# EAGLE board control_board (EAGLE 9.6.2)
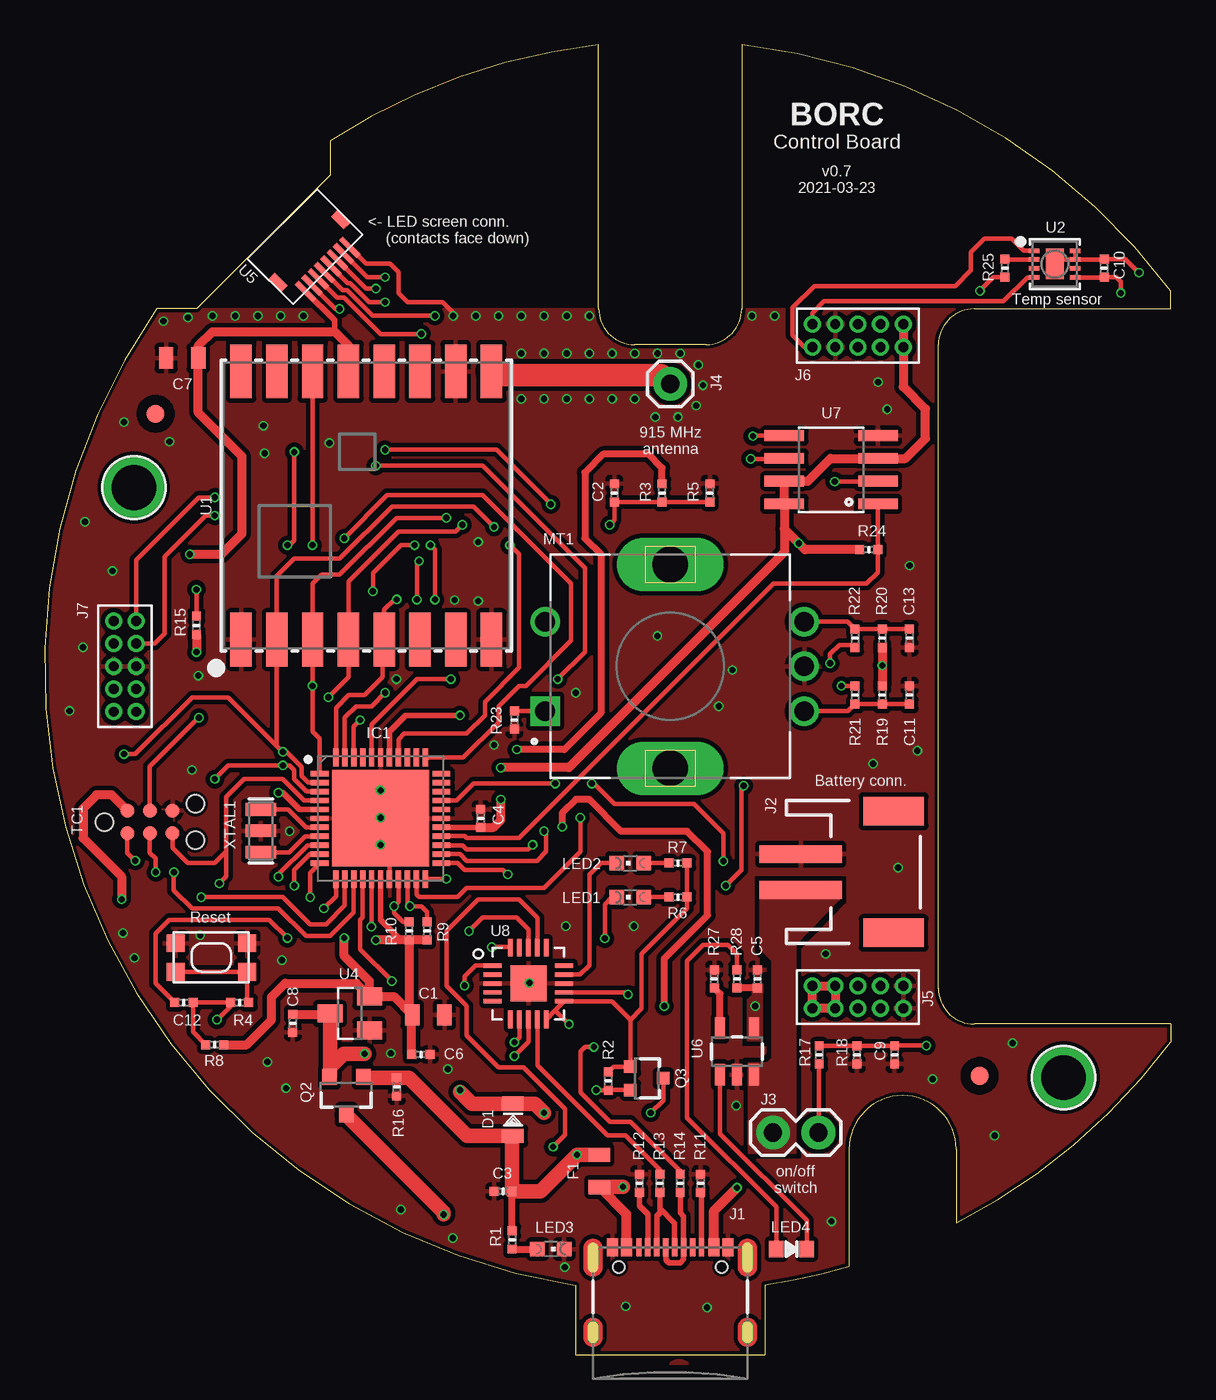
[diagram p0: board, top side]
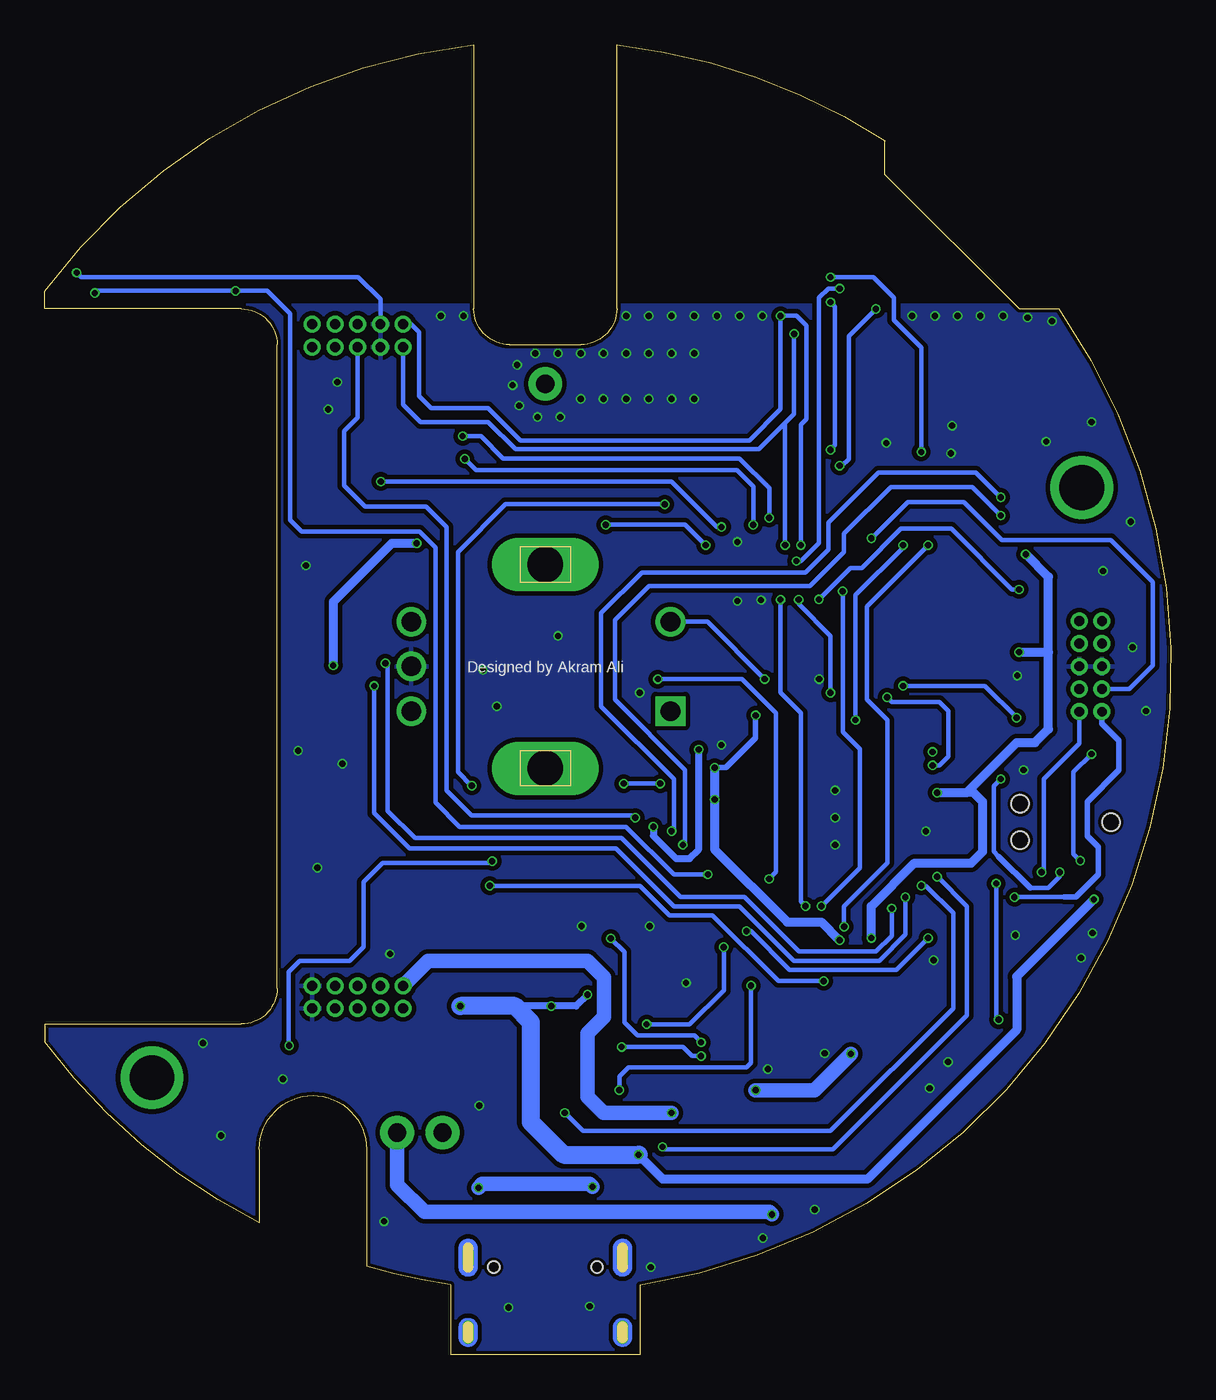
[diagram p1: board, bottom side, seen from below]

Size 62.99 x 73.27 mm. Coordinates in mm from the lower left corner, seen from the top.
Outline: 62.99,18.5 62.99,17.5 arc-26 50.99,7.37 50.99,11.5 arc180 44.99,11.5 44.99,4.96 arc-8 40.29,3.9 40.29,0 29.69,0 29.69,3.9 arc-116 6.26,58.5 8.49,58.5 15.99,66 15.99,67.89 arc-26 30.99,73.27 30.99,58.5 arc90 32.99,56.5 36.99,56.5 arc90 38.99,58.5 38.99,73.27 arc-47 62.99,59.5 62.99,58.5 51.99,58.5 arc90 49.99,56.5 49.99,20.5 arc90 51.99,18.5 62.99,18.5
Copper layers (1*16): Top 0.035559375mm / dielectric 1.6mm / Bottom 0.035559375mm
Design rules "jlcpcb2layer *": minimum track width 5mil, minimum drill 12mil, track to track 5mil, track to pad 5mil, pad to pad 5mil, via to via 5mil, smd to smd 5mil, copper to edge 8mil, drill to drill 6mil, minimum pad ring 5mil, minimum via ring 3mil, stop-mask expansion 2.5mil, vias tented up to drill 14mil, thermal gap 10mil
Net classes: 1 power: width 0.381 mm, clearance 0.254 mm

## Footprints (pad centres in the part's own frame; a part is rotated, then mirrored left to right if it is on the bottom)
0805 = smd 0.8 x 1.2: 1 -0.9,0; 2 0.9,0
MICROBUILDER__0402MP = smd 0.5 x 0.5: 1 -0.508,0; 2 0.508,0
QFN50P700X700X100-45N = smd 1 x 0.3: 1 -3.4,2.5; 2 -3.4,2; 3 -3.4,1.5; 4 -3.4,1; 5 -3.4,0.5; 6 -3.4,0; 7 -3.4,-0.5; 8 -3.4,-1; 9 -3.4,-1.5; 10 -3.4,-2; 11 -3.4,-2.5; 23 3.4,-2.5; 24 3.4,-2; 25 3.4,-1.5; 26 3.4,-1; 27 3.4,-0.5; 28 3.4,0; 29 3.4,0.5; 30 3.4,1; 31 3.4,1.5; 32 3.4,2; 33 3.4,2.5 | smd 0.3 x 1: 12 -2.5,-3.4; 13 -2,-3.4; 14 -1.5,-3.4; 15 -1,-3.4; 16 -0.5,-3.4; 17 0,-3.4; 18 0.5,-3.4; 19 1,-3.4; 20 1.5,-3.4; 21 2,-3.4; 22 2.5,-3.4; 34 2.5,3.4; 35 2,3.4; 36 1.5,3.4; 37 1,3.4; 38 0.5,3.4; 39 0,3.4; 40 -0.5,3.4; 41 -1,3.4; 42 -1.5,3.4; 43 -2,3.4; 44 -2.5,3.4 | smd 5.4 x 5.4: 45 0,0
USB-C-16P-2LAYER-PADS = smd 0.3 x 1: A5 -1.25,-0.34; A6 -0.25,-0.34; A7 0.25,-0.34; A8 1.25,-0.34; B5 1.75,-0.34; B6 0.75,-0.34; B7 -0.75,-0.34; B8 -1.75,-0.34 | smd 0.6 x 1: GND -3.225,-0.34; GND2 3.225,-0.34; VBUS1 -2.45,-0.34; VBUS2 2.45,-0.34 | drill 0.4 pad 0.6 long: SHLD1 -4.318,-0.915; SHLD2 4.318,-0.915; SHLD3 -4.318,-5.095; SHLD4 4.318,-5.095 | hole 0.65: -2.89,-1.445; 2.89,-1.445
JST-2-SMD = smd 1 x 4.6: 1 -1,-3.7; 2 1,-3.7 | smd 1.6 x 3.4: NC1 -3.4,1.5; NC2 3.4,1.5
1X02 = drill 1.016 pad 1.88: 1 0,0; 2 2.54,0
1X01 = drill 1.016 pad 1.88: 1 0,0
HEADER_1.27MM_2X5 = drill 0.55 pad 0.95: 1 0.865,0.865; 2 2.135,0.865; 3 0.865,2.135; 4 2.135,2.135; 5 0.865,3.405; 6 2.135,3.405; 7 0.865,4.675; 8 2.135,4.675; 9 0.865,5.945; 10 2.135,5.945
CHIPLED_0603 = smd 0.8 x 0.8: A 0,-0.75; C 0,0.75
0603-LED = smd 0.8 x 0.9: MINUS -0.85,0; PLUS 0.85,0
XDCR_PEC11R-4215F-S0024 = drill 1.1 square: 1 -2.5,7 | drill 1.1: 2 2.5,7; A -2.5,-7.5; B 2.5,-7.5; COM 0,-7.5 | drill 2 long: S1 -5.7,0; S2 5.7,0
SOT23-3 = smd 0.8 x 0.9: 1 -0.95,-1; 2 0.95,-1; 3 0,1.1
SOT323 = smd 0.7 x 0.7: 1 -0.65,-0.925; 2 0.65,-0.925; 3 0,0.925
KMR2 = smd 1 x 1: 1 2,0.8; 2 2,-0.8; 3 -2,0.8; 4 -2,-0.8
TC2030-IDC-NL = smd 0.787 x 0.787: 1 -1.27,-0.635; 2 -1.27,0.635; 3 0,-0.635; 4 0,0.635; 5 1.27,-0.635; 6 1.27,0.635 | hole 0.991: -2.54,0; 2.54,1.016; 2.54,-1.016
RFM69HCW-XXXS2 = smd 3 x 1.2: 1 -7.5,7; 2 -7.5,5; 3 -7.5,3; 4 -7.5,1; 5 -7.5,-1; 6 -7.5,-3; 7 -7.5,-5; 8 -7.5,-7; 9 7.5,-7; 10 7.5,-5; 11 7.5,-3; 12 7.5,-1; 13 7.5,1; 14 7.5,3; 15 7.5,5; 16 7.5,7
SHT3X = smd 0.6 x 0.25: 1 -1.15,0.75; 2 -1.15,0.25; 3 -1.15,-0.25; 4 -1.15,-0.75; 5 1.15,-0.75; 6 1.15,-0.25; 7 1.15,0.25; 8 1.15,0.75 | smd 1 x 1.7: THERMAL 0,0
SOT23 = smd 1 x 1.4: 1 -0.95,-1.1; 2 0.95,-1.1; 3 0,1.1
59453-081110EDHLF = smd 0.3 x 1.4: P$1 1,3.6; P$2 1.5,3.6; P$3 2,3.6; P$4 2.5,3.6; P$5 3,3.6; P$6 3.5,3.6; P$7 4,3.6; P$8 4.5,3.6 | smd 0.52 x 1: P$9 0.26,2.15; P$10 5.24,2.15
SOT23-5 = smd 0.55 x 1.2: 1 -0.95,-1.3; 2 0,-1.3; 3 0.95,-1.3; 4 0.95,1.3; 5 -0.95,1.3
SO08 = smd 0.61 x 2.21: 1_CS -1.905,-2.616; 2_SO -0.635,-2.616; 3_WP 0.635,-2.616; 4_GND 1.905,-2.616; 5_SI 1.905,2.616; 6_SCK 0.635,2.616; 7_HOLD -0.635,2.616; 8_VCC -1.905,2.616
FTDI_FT231XQ-R_PACKAGE = smd 0.25 x 1: 3V3OUT 0.968,-2.032; CBUS2 -0.532,-2.032; CBUS3 0.968,1.968; CTS# -1.032,-2.032; DTR# -0.032,1.968; RTS# -0.532,1.968; TXD 0.468,1.968; USBDM 0.468,-2.032; USBDP -0.032,-2.032; VCCIO -1.032,1.968 | smd 1 x 0.25: CBUS0 1.968,0.968; CBUS1 1.968,0.468; DCD# -2.032,-1.032; DSR# -2.032,-0.532; GND_PIN3 -2.032,-0.032; GND_PIN13 1.968,-0.032; RESET# 1.968,-1.032; RI# -2.032,0.468; RXD -2.032,0.968; VCC 1.968,-0.532 | smd 2 x 2: GND_PIN21 -0.032,-0.032
MOUNTINGHOLE_2.5_PLATED = drill 2.5 pad 3.2: P$1 0,0
FIDUCIAL_1MM = smd 1 x 1: 1 0,0
RESONATOR-SMD = smd 0.7 x 1.7: 1 -1.2,0; 2 0,0; 3 1.2,0

## Placement (x,y rotation side)
C1  0.33µF  [0805]  21.45,19.01 0 top
C2  0.1uF  [MICROBUILDER__0402MP]  31.86,48.2 90 top
C3  0.1uF  [MICROBUILDER__0402MP]  25.64,9.14 180 top
C4  0.1uF  [MICROBUILDER__0402MP]  24.39,30 90 top
C5  10uF  [MICROBUILDER__0402MP]  39.86,21.03 270 top
C6  0.1uF  [MICROBUILDER__0402MP]  21.04,16.79 0 top
C7  0.33µF  [0805]  7.69,55.75 0 top
C8  1uF  [MICROBUILDER__0402MP]  13.87,18.54 270 top
C9  0.1uF  [MICROBUILDER__0402MP]  47.54,16.77 270 top
C10  0.1uF  [MICROBUILDER__0402MP]  59.25,60.77 90 top
C11  0.1uF  [MICROBUILDER__0402MP]  48.37,36.9 270 top
C12  0.1uF  [MICROBUILDER__0402MP]  7.79,19.7 0 top
C13  0.1uF  [MICROBUILDER__0402MP]  48.37,40.08 90 top
D1  [0805]  26.19,13.15 90 top
F1  6V 0.5A  [0805]  31.02,10.29 90 top
IC1  ATMEGA1284P-MU  [QFN50P700X700X100-45N]  18.79,30 0 top
J1  USB Female Type C Connector  [USB-C-16P-2LAYER-PADS]  34.99,6.35 0 top
J2  [JST-2-SMD]  45.99,27 270 top
J3  [1X02]  43.27,12.43 180 top
J4  [1X01]  34.99,54.3 0 top
J5  20021311-00010T4LF  [HEADER_1.27MM_2X5]  48.89,18.5 90 top
J6  20021311-00010T4LF  [HEADER_1.27MM_2X5]  48.89,55.5 90 top
J7  20021311-00010T4LF  [HEADER_1.27MM_2X5]  2.99,35.1 0 top
LED1  [CHIPLED_0603]  32.75,25.6 90 top
LED2  [CHIPLED_0603]  32.75,27.5 90 top
LED3  PWR  [CHIPLED_0603]  28.31,5.91 270 top
LED4  LED0603  [0603-LED]  41.77,5.91 180 top
MT1  PEC11R-4215F-S0024  [XDCR_PEC11R-4215F-S0024]  34.99,38.5 90 top
Q2  BSS84-7-F  [SOT23-3]  16.87,14.54 180 top
Q3  BSS138PW,115  [SOT323]  33.68,15.46 270 top
R1  1K  [MICROBUILDER__0402MP]  26.15,6.42 270 top
R2  10K  [MICROBUILDER__0402MP]  31.52,15.31 270 top
R3  10M  [MICROBUILDER__0402MP]  34.53,48.2 90 top
R4  100  [MICROBUILDER__0402MP]  10.9,19.7 0 top
R5  10M  [MICROBUILDER__0402MP]  37.2,48.2 90 top
R6  330  [MICROBUILDER__0402MP]  35.42,25.6 180 top
R7  330  [MICROBUILDER__0402MP]  35.42,27.5 180 top
R8  10K  [MICROBUILDER__0402MP]  9.51,17.34 180 top
R9  4.7K  [MICROBUILDER__0402MP]  21.39,23.7 270 top
R10  4.7K  [MICROBUILDER__0402MP]  20.39,23.7 270 top
R11  5.1K  [MICROBUILDER__0402MP]  36.69,9.6 90 top
R12  5.1K  [MICROBUILDER__0402MP]  33.26,9.6 90 top
R13  27  [MICROBUILDER__0402MP]  34.4,9.6 270 top
R14  27  [MICROBUILDER__0402MP]  35.55,9.6 270 top
R15  10K  [MICROBUILDER__0402MP]  8.49,40.8 90 top
R16  10K  [MICROBUILDER__0402MP]  19.69,14.98 90 top
R17  10M  [MICROBUILDER__0402MP]  43.32,16.77 270 top
R18  10M  [MICROBUILDER__0402MP]  45.43,16.77 270 top
R19  10K  [MICROBUILDER__0402MP]  46.85,36.9 270 top
R20  10K  [MICROBUILDER__0402MP]  46.85,40.08 90 top
R21  10K  [MICROBUILDER__0402MP]  45.32,36.9 90 top
R22  10K  [MICROBUILDER__0402MP]  45.32,40.08 270 top
R23  10K  [MICROBUILDER__0402MP]  26.27,35.5 270 top
R24  10K  [MICROBUILDER__0402MP]  46.09,45.03 0 top
R25  10K  [MICROBUILDER__0402MP]  53.71,60.78 90 top
R27  2K  [MICROBUILDER__0402MP]  37.45,21.03 90 top
R28  1K  [MICROBUILDER__0402MP]  38.72,21.03 270 top
SW1  SPST_TACT-KMR2  [KMR2]  9.32,22.22 180 top
TC1  TC2030-IDC-NL  [TC2030-IDC-NL]  5.89,29.8 0 top
U1  915MHz  [RFM69HCW-XXXS2]  17.99,47.5 90 top
U2  [SHT3X]  56.49,61 0 top
U4  MCP1703CB  [SOT23]  17.06,19.08 90 top
U5  59453-081110EDHLF  [59453-081110EDHLF]  15.23,65.2 225 top
U6  MCP73831  [SOT23-5]  38.72,16.96 0 top
U7  AT25F512BJEDEC_3.9MM  [SO08]  43.99,49.5 90 top
U8  FT231XQ-R  [FTDI_FT231XQ-R_PACKAGE]  27.09,20.8 0 top
U$2  MOUNTINGHOLE2.5  [MOUNTINGHOLE_2.5_PLATED]  56.99,15.5 0 top
U$3  MOUNTINGHOLE2.5  [MOUNTINGHOLE_2.5_PLATED]  4.99,48.5 0 top
U$8  FIDUCIAL  [FIDUCIAL_1MM]  52.29,15.6 0 top
U$9  FIDUCIAL  [FIDUCIAL_1MM]  6.2,52.63 0 top
XTAL1  16 MHz  [RESONATOR-SMD]  12.09,29.3 90 top

## Library data of the parts
C1 C7 = SparkFun-Capacitors; PROD_ID: CAP-08469
C2-C6 C8-C13 = Adafruit Feather 32u4 Bluefruit LE; MPN: GRM155R71C104KA88J
D1 = SCHOTTKY_0805
F1 = SparkFun-Fuses; MPN: MF-PSML110-2; PROD_ID: RES-13945
IC1 = ATMEGA1284P-MU; AVAILABILITY: Warning; DESCRIPTION: AVR AVR® ATmega Microcontroller IC 8-Bit 20MHz 128KB (64K x 16) FLASH 44-VQFN (7x7); MF: Microchip; MP: ATMEGA1284P-MU; PACKAGE: VQFN-44 Microchip; PRICE: None; PURCHASE-URL: https://pricing.snapeda.com/search/part/ATMEGA1284P-MU/?ref=eda
J1 = SparkFun-Connectors; PROD_ID: CONN-14122
J2 = SparkFun-Connectors; PROD_ID: CONN-11443; SF_ID: PRT-08612
J3 J4 = SparkFun-Connectors
J5-J7 = Amphenol
LED1-LED3 SW1 U$8 U$9 = adafruit
LED4 U7 = LowPowerLab
MT1 = PEC11R-4215F-S0024; AVAILABILITY: Warning; DESCRIPTION: Rotary Encoder Mechanical 24 Quadrature (Incremental) Vertical; MF: Bourns; MP: PEC11R-4215F-S0024; PACKAGE: None; PRICE: None; PURCHASE-URL: https://pricing.snapeda.com/search/part/PEC11R-4215F-S0024/?ref=eda
Q2 Q3 = MOSFETs
R1 R2 R4 R6-R16 R19-R25 R27 R28 = Adafruit Feather 32u4 Bluefruit LE; MPN: RC0402FR-7W10KL
R3 R5 R17 R18 = Adafruit Feather 32u4 Bluefruit LE; MPN: RC0402JR-0710KL
TC1 = TagConnect
U1 = SparkFun-RF; PROD_ID: IC-11997
U2 = SHT31
U4 = linear
U5 = 59453-081110EDHLF
U6 XTAL1 = SparkFun
U8 = ftdi_ft231xq-r
U$2 U$3 = ADS1x15

## Nets
A: C11.2 MT1.A R19.2 R21.1
ANT: J4.1 U1.9
B: C13.2 MT1.B R20.2 R22.1
BLUE: IC1.16 U5.P$2
CHANNEL_A: IC1.11 R21.2
CHANNEL_B: IC1.12 R22.2
CS: IC1.26 R24.2 U7.1_CS
CURRENT_SENSE_POWER: IC1.24 J7.10
D2: IC1.42 U1.14
DRIVER_POWER: IC1.21 J6.5
DTR: C12.1 U8.DTR#
FTDI_3.3V: Q3.1 R2.1 R6.1 R7.1 U8.3V3OUT U8.RESET# U8.VCCIO
GND [power]: C1.2 C2.2 C3.2 C4.2 C5.1 C6.2 C7.1 C8.2 C9.2 C10.2 C11.1 C13.1 IC1.6 IC1.18 IC1.28 IC1.39 IC1.45 J1.GND J1.GND2 J2.1 J5.1 J5.2 J6.7 J6.8 J7.5 J7.6 LED3.C MT1.COM R5.2 R11.2 R12.2 R16.1 R18.2 R23.2 R27.2 SW1.2 SW1.4 TC1.6 U1.1 U1.8 U1.10 U2.7 U2.8 U2.THERMAL U4.1 U5.P$1 U6.2 U7.4_GND U8.GND_PIN3 U8.GND_PIN13 U8.GND_PIN21 XTAL1.2
GREEN: IC1.43 U5.P$3
IN1: IC1.13 J7.1
IN2: IC1.14 J7.2
KNOB: IC1.40 MT1.2
MISO: IC1.2 TC1.1 U1.2 U7.2_SO
MOSI: IC1.1 TC1.4 U1.3 U7.5_SI
MOTOR_CONTROL: IC1.25 J7.8
N$1: IC1.8 XTAL1.1
N$2: LED3.A R1.2
N$3: IC1.7 XTAL1.3
N$4: J1.B5 R11.1
N$5: J1.A5 R12.1
N$6: J1.A6 J1.B6 R14.2
N$7: J1.A7 J1.B7 R13.2
N$8: R14.1 U8.USBDP
N$9: R13.1 U8.USBDM
N$10: F1.1 J1.VBUS1 J1.VBUS2
N$11: MT1.1 R23.1
N$12: R4.2 SW1.1 SW1.3
N$13: LED1.C U8.CBUS2
N$14: Q3.2 R2.2 U8.RXD
N$15: LED1.A R6.2
N$16: LED4.PLUS R28.1
N$17: LED2.A R7.2
N$18: LED2.C U8.CBUS1
N$19: LED4.MINUS U6.1
N$20: R25.2 U2.2
PROG1: R27.1 U6.5
RED: IC1.15 U5.P$4
RESET: C12.2 IC1.4 R4.1 R8.2 TC1.5
RX: IC1.9 U8.TXD
SCK: IC1.3 TC1.3 U1.4 U7.6_SCK
SCL: IC1.19 J6.10 R10.1 U2.4 U5.P$5
SDA: IC1.20 J6.9 R9.1 U2.1 U5.P$6
SDB: IC1.22 U5.P$7
SS: IC1.44 R15.2 U1.5
TEMP: IC1.34 J7.3
TEMP_SENSOR_POWER: C10.1 IC1.23 R25.1 U2.5
TX: IC1.10 Q3.3
VBAT: J3.1 Q2.3 R17.2
VBAT_CHG: J2.2 J3.2 U6.3
VBAT_SENSE: C9.1 IC1.30 R17.1 R18.1
VBUS [power]: C3.1 C5.2 D1.1 F1.2 Q2.1 R1.1 R3.2 R16.2 R28.2 TC1.2 U6.4 U8.VCC
VBUS_SENSE: C2.1 IC1.37 R3.1 R5.1
VCC: C1.1 C4.1 C6.1 C7.2 IC1.5 IC1.17 IC1.27 IC1.38 J6.1 J6.2 R8.1 R9.2 R10.2 R15.1 R19.1 R20.1 R24.1 U1.13 U4.2 U5.P$8 U7.3_WP U7.7_HOLD U7.8_VCC
VIN [power]: C8.1 D1.2 J5.7 J5.8 J5.9 J5.10 Q2.2 U4.3

## Tracks (layer width: path | path; a pad name or v marks a point on that pad's centre or on a via)
A
  Top 0.254: C11.2 R19.2 R21.1 44.93,36 MT1.A
ANT
  Top 1.27: J4.1 34.96,54.3 34.46,54.8 25.19,54.8 U1.9
B
  Top 0.254: C13.2 R20.2 R22.1 44.91,41 MT1.B
BLUE  (via drill 0.35)
  Top 0.254: v13.57,45.28 13.7,45.28 13.96,45.54 v13.96,50.49 | U5.P$2 18.04,60.27 v19.04,60.27 | IC1.16 v18.29,23.96 v18.27,23.95
  Bottom 0.254: v13.57,45.28 17,41.85 17,36.65 15.86,35.5 15.86,27.5 18.27,25.09 v18.27,23.95 | v19.04,60.27 16.62,60.27 15.48,59.13 15.48,57.86 13.96,56.33 v13.96,50.49
CHANNEL_A  (via drill 0.35)
  Top 0.254: IC1.11 14.84,26.96 v14.84,25.6 | R21.2 v44.56,37.41
  Bottom 0.254: v14.84,25.6 14.84,23.5 16.3,22.04 21.07,22.04 24.12,25.09 27.8,25.09 31.03,28.32 42.58,28.32 44.56,30.3 v44.56,37.41
CHANNEL_B  (via drill 0.35)
  Top 0.254: IC1.12 16.29,25.64 v15.61,24.96 | R22.2 45.2,39.7 44.44,39.7 43.93,39.19 v43.93,38.68
  Bottom 0.254: v15.61,24.96 15.61,23.44 16.5,22.55 20.81,22.55 23.86,25.6 27.42,25.6 30.72,28.9 42.28,28.9 43.8,30.42 43.8,38.55 v43.93,38.68
CS
  Top 0.254: IC1.26 22.21,29.03 23.48,29.03 23.61,28.9 26.53,28.9 40.75,43.12 45.96,43.12 46.59,43.76 R24.2 46.59,47.19 46.6,47.2 U7.1_CS
CURRENT_SENSE_POWER  (via drill 0.35)
  Top 0.254: IC1.24 23.23,28.01 23.61,27.63 27.54,27.63 28.05,28.14 28.05,29.15 v27.93,29.28 | J7.10 5.12,44.45 8.62,47.95 v9.51,47.95
  Bottom 0.254: v9.51,47.95 10.91,49.35 16.37,49.35 19.16,46.55 19.16,45.03 20.43,43.76 29.58,43.76 31.86,41.47 31.86,36.27 27.8,32.2 27.8,29.41 v27.93,29.28
D2  (via drill 0.35)
  Top 0.254: IC1.42 17.29,35.15 v17.64,35.5 | v14.97,45.28 14.97,54.99 U1.14
  Bottom 0.254: v14.97,45.28 14.97,45.16 17.64,42.49 v17.64,35.5
DRIVER_POWER  (via drill 0.35)
  Top 0.254: IC1.21 20.79,25.75 20.94,25.6 23.1,25.6 23.61,26.11 27.93,26.11 29.96,28.14 v29.96,30.04
  Bottom 0.254: J6.5 45.48,52.43 46.24,51.67 46.24,48.61 45.07,47.44 41.64,47.44 40.5,46.3 40.5,31.57 39.1,30.17 30.08,30.17 v29.96,30.04
DTR  (via drill 0.35)
  Top 0.254: U8.DTR# 27.05,23.8 26.4,24.45 24.5,24.45 v23.73,23.69 | v13.57,23.31 12.56,24.33 6.97,24.33 6.21,23.57 6.21,20.77 C12.1
  Bottom 0.254: v23.73,23.69 23.48,23.69 21.32,21.53 15.35,21.53 v13.57,23.31
FTDI_3.3V  (via drill 0.35)
  Top 0.254: 28.55,19.26 U8.RESET# 31.72,19.77 32.75,18.74 | 28.55,19.26 U8.3V3OUT | U8.VCCIO 26.05,22.8 v25,22.8 | v29.32,18.49 28.55,19.26 | R2.1 31.81,16.11 Q3.1 32.75,18.74 | R7.1 R6.1 35.93,24.96 33.39,22.42 33.39,19.37 32.75,18.74
  Bottom 0.254: v25,22.8 25,20.39 26.91,18.49 v29.32,18.49
GND  (via drill 0.35)
  Top 0.254: C10.2 60.44,61.28 v61.2,60.52 | U2.7 U2.8 | U5.P$1 17.98,61.03 19.33,61.03 19.8,60.56 19.8,59.38 20.31,58.87 22.25,58.87 22.85,58.28 v22.85,58.11 | U2.7 56.74,61.25 U2.THERMAL | IC1.18 19.29,28.02 v18.78,28.52 | U2.7 59.22,61.25
  Top 0.381: 59.22,61.25 C10.2
  Bottom 0.254: v61.2,60.52 60.95,60.27 45.45,60.27 44.21,59.03 J6.8
  other vias: 8.24,32.71 18.78,30.04 24.12,58.11 25.39,58.11 26.66,58.11 27.93,58.11 29.2,58.11 30.47,58.11 39.56,58.11 40.83,58.11 14.46,58.11 13.19,58.11 11.92,58.11 10.65,58.11 9.38,58.11 8.01,58.01 6.64,57.81 34.28,40.2 15.91,50.99 24.24,42.16 22.92,42.21 12.23,51.96 4.43,52.17 6.97,51.07 46.62,54.4 8.59,37.99 13.27,22.07 12.46,16.38 13.5,14.9 22.82,6.52 29.09,4.9 32.5,2.71 37.04,2.64 54.13,17.43 44,7.46 53.12,12.26 48.81,33.78 13.7,29.28 8.7,23.46 22.54,15.97 27.11,20.8 29.7,37.03 24.24,45.46 19.92,8.12 18.78,31.57 1.38,36.01 2.14,39.57 2.24,46.59 3.8,43.84 26.66,53.47 27.93,53.47 29.2,53.47 30.47,53.47 31.74,53.47 33.01,53.47 33.01,56.01 31.74,56.01 30.47,56.01 29.2,56.01 27.93,56.01 26.66,56.01 34.28,56.01 35.55,56.01 36.56,55.37 36.82,54.23 36.43,53.08 35.42,52.45 34.15,52.45 19.67,37.79 12.3,50.42 19.37,16.86 4.38,23.59 5.02,22.19 47.74,27.25 37.7,36.27 38.68,13.93 43.67,22.42 49.66,15.41 46.33,33.06 38.47,38.3 48.37,44.14 47.13,52.88 32.96,23.97 29.15,23.97 25.13,34.11
  pour Top: 34.99,-0.5 arc-90 35.99,-0.5
  pour Top (rank 6): -2.01,-3.5 -2.01,58.48 71.99,58.48 71.99,-3.5
  pour Bottom (rank 6): -3.01,-4.5 -3.01,58.72 72.99,58.72 72.99,-4.5
GREEN  (via drill 0.35)
  Top 0.254: U5.P$3 17.25,60.34 17.97,59.63 v18.53,59.63 | IC1.43 16.79,35.63 17.42,36.27 18.27,36.27 v19.04,37.03 | v20.94,44.39 20.81,44.27 v20.81,42.23
  Bottom 0.254: v18.53,59.63 19.16,59.63 19.67,59.13 19.67,45.41 20.69,44.39 v20.94,44.39 | v19.04,37.03 19.04,37.52 19.03,37.52 19.03,40.19 20.81,41.98 v20.81,42.23
IN1  (via drill 0.35)
  Top 0.254: IC1.13 16.79,25.13 15.73,24.07 14.84,24.07 13.32,25.6 v8.75,25.6
  Bottom 0.254: 5.95,25.6 v8.75,25.6
  Bottom 0.305: J7.1 3.85,35.3 2.91,34.36 2.91,32.71 4.68,30.93 4.68,29.03 4.05,28.39 4.05,26.87 5.32,25.6 5.95,25.6
IN2  (via drill 0.35)
  Top 0.254: IC1.14 17.29,24.74 15.96,23.41 14.62,23.41 13.07,24.96 8.24,24.96 7.22,25.98 v7.22,27
  Bottom 0.254: J7.2 5.12,34.18 7.1,32.2 7.1,27.12 v7.22,27
KNOB  (via drill 0.35)
  Top 0.254: IC1.40 18.29,35.26 20.81,37.79 v22.72,37.79
  Bottom 0.254: v22.72,37.79 25.93,41 MT1.2
MISO  (via drill 0.35)
  Top 0.254: IC1.2 14.73,32 14.36,32.37 14.36,32.88 13.52,33.72 v13.32,33.72 | v13.32,33.72 12.99,34.05 U1.2 12.99,43.55 13.96,44.52 16.5,44.52 19.42,47.44 23.99,47.44 v25.13,46.3 | TC1.1 4.62,28.08 v5.07,27.63 | v4.43,33.6 5.07,33.6 8.24,36.77 10.27,36.77 v13.32,33.72 | U7.2_SO 46.58,48.84 v44.18,48.84
  Bottom 0.254: v5.07,27.63 5.45,28.01 5.45,32.58 v4.43,33.6 | v25.13,46.3 25.39,46.3 27.93,48.84 v44.18,48.84
MOSI  (via drill 0.35)
  Top 0.254: IC1.1 15.39,34.45 14.97,34.87 v14.97,37.41 14.97,39.99 U1.3 14.99,43.14 15.48,43.63 16.5,43.63 19.67,46.81 v22.46,46.81 | TC1.4 5.89,32.89 v8.62,35.63 | U7.5_SI 39.64,51.41 v39.61,51.38
  Bottom 0.254: v8.62,35.63 10.4,37.41 v14.97,37.41 | v22.46,46.81 22.46,48.48 24.12,50.13 37.35,50.13 38.59,51.38 v39.61,51.38
MOTOR_CONTROL  (via drill 0.35)
  Top 0.254: J7.8 6.16,39.77 6.72,40.33 6.72,44.65 9,46.93 v9.51,46.93 | v27.29,28.52 27.04,28.27 23.61,28.27 23.37,28.5 IC1.25
  Bottom 0.254: v27.29,28.52 27.16,28.65 27.16,32.71 31.1,36.65 31.1,41.09 29.2,43 20.18,43 18.27,44.9 18.27,45.92 15.66,48.53 11.11,48.53 v9.51,46.93
N$1
  Top 0.254: IC1.8 14.56,29 13.66,28.1 XTAL1.1
N$2
  Top 0.381: R1.2 LED3.A
N$3
  Top 0.254: IC1.7 14.63,29.5 13.63,30.5 XTAL1.3
N$4
  Top 0.305: J1.B5 36.74,9.04 R11.1
N$5
  Top 0.305: J1.A5 33.74,7.85 33.26,8.33 R12.1
N$6
  Top 0.305: R14.2 35.55,7.95 35.74,7.75 J1.B6 35.74,5.34 35.55,5.15 34.91,5.15 34.74,5.33 J1.A6
N$7
  Top 0.305: J1.B7 34.24,7.78 34.4,7.95 34.4,8.2 | 34.4,8.2 R13.2 | J1.A7 35.24,7.37 34.4,8.2
N$8  (via drill 0.35)
  Top 0.254: v30.72,17.22 30.21,17.22 29.96,16.96 29.96,14.68 31.61,13.03 32.78,13.03 35.55,10.26 R14.1 | U8.USBDP 27.05,17.49 v26.27,16.71
  Bottom 0.254: v30.72,17.22 27.29,17.22 26.78,16.71 v26.27,16.71
N$9
  Top 0.254: R13.1 34.4,10.33 32.47,12.26 31.48,12.26 27.55,16.19 U8.USBDM
N$10  (via drill 0.35)
  Top 0.508: F1.1 | v32.34,9.39 v32.35,9.39
  Top 0.559: J1.VBUS2 37.44,8.06 v38.72,9.34 | F1.1 32.54,7.87 J1.VBUS1
  Top 0.813: F1.1 v32.34,9.39
  Bottom 0.813: v38.72,9.34 38.51,9.55 32.5,9.55 v32.35,9.39
N$11
  Top 0.254: R23.1 27.97,36.01 MT1.1
N$12
  Top 0.254: SW1.1 SW1.3 11.32,19.79 R4.2
N$13  (via drill 0.35)
  Top 0.254: U8.CBUS2 26.55,17.75 v26.27,17.47 | LED1.C 31.74,25.6 31.33,25.19 v31.33,23.29
  Bottom 0.254: v31.33,23.29 30.57,22.52 30.57,18.59 29.83,17.85 26.66,17.85 v26.27,17.47
N$14  (via drill 0.35)
  Top 0.254: Q3.2 31.53,14.81 R2.2 31.1,14.8 v30.85,14.8 | U8.RXD 24.1,21.77 23.48,21.15 v23.48,20.64
  Bottom 0.254: v23.48,20.64 23.48,16.33 23.73,16.07 30.34,16.07 30.85,15.56 v30.85,14.8
N$15
  Top 0.254: R6.2 LED1.A
N$16
  Top 0.254: LED4.PLUS 40.92,8.27 35.93,13.26 35.93,22.04 36.82,22.93 38.21,22.93 38.72,22.42 R28.1
N$17
  Top 0.254: LED2.A R7.2
N$18
  Top 0.254: U8.CBUS1 29.95,21.27 30.47,21.79 30.47,26.87 31.1,27.5 LED2.C
N$19
  Top 0.254: U6.1 37.77,12.37 42.62,7.52 LED4.MINUS
N$20
  Top 0.254: U2.2 53.74,61.25 R25.2
PROG1
  Top 0.381: U6.5 37.77,20.2 R27.1
RED  (via drill 0.35)
  Top 0.254: U5.P$4 16.95,59.94 17.09,59.94 18.15,58.87 v19.04,58.87 | v19.04,50.62 25.26,50.62 v28.31,47.57 | IC1.15 17.79,24.48 17.64,24.33 17.64,22.68 v19.42,20.9 | v39.1,31.82 38.97,31.69 38.97,27.12 v38.09,26.23
  Bottom 0.254: v19.04,58.87 18.78,58.62 18.78,50.87 v19.04,50.62 | v28.31,47.57 37.2,47.57 39.86,44.9 39.86,32.58 v39.1,31.82 | v38.09,26.23 29.7,26.23 28.05,24.58 25.64,24.58 21.96,20.9 v19.42,20.9
RESET  (via drill 0.35)
  Top 0.254: IC1.4 14.52,31 13.32,32.2 11.16,32.2 10.15,31.19 10.15,28.14 | TC1.5 7.16,28.33 7.99,27.5 9.51,27.5 10.15,28.14 | v9.64,18.74 10.39,19.5 R4.1 C12.2 8.29,18.05 R8.2 | 10.15,28.14 10.15,26.74 v9.76,26.36
  Bottom 0.254: v9.76,26.36 9.76,18.87 v9.64,18.74
RX  (via drill 0.35)
  Top 0.254: IC1.9 14.7,28.5 13.07,26.87 v13.07,26.74 | U8.TXD 27.55,24.45 26.53,25.47 24.24,25.47 22.46,23.69 22.46,20.64 23.61,19.5 23.61,17.85 25.39,16.07 26.78,16.07 29.09,13.76 29.09,12.29 v28.43,11.63
  Bottom 0.254: v13.07,26.74 11.42,25.09 11.42,18.99 18.91,11.5 28.31,11.5 v28.43,11.63
SCK  (via drill 0.35)
  Top 0.254: IC1.3 14.66,31.5 13.96,32.2 13.96,32.71 13.7,32.96 v13.32,32.96 10.27,32.96 v9.51,32.2 | v15.86,36.77 16.99,37.9 U1.4 16.99,43.23 19.8,46.05 22.97,46.05 v23.35,46.43 | TC1.3 5.89,28.08 6.21,27.76 v6.21,27 | U7.6_SCK 41.29,50.13 41.26,50.11 v39.48,50.11
  Bottom 0.254: v15.86,36.77 15.61,36.52 12.94,36.52 12.43,36.01 12.43,33.47 12.94,32.96 v13.32,32.96 | v6.21,27 6.21,26.74 6.84,26.11 7.86,26.11 | v39.48,50.11 38.85,49.47 24.27,49.47 23.35,48.56 v23.35,46.43 | 9.64,27.88 9.89,28.14 9.89,31.82 v9.51,32.2
  Bottom 0.305: 7.86,26.11 9.64,27.88
SCL  (via drill 0.35)
  Top 0.254: IC1.19 19.79,25.33 v19.54,25.09 19.54,24.71 20.04,24.21 R10.1 | J6.10 42.94,58.27 43.59,58.92 53.63,58.92 54.96,60.25 U2.4 | U5.P$5 16.65,59.53 16.92,59.53 18.34,58.11 v21.83,58.11 | v18.35,42.71 18.35,43.71 19.92,45.28 v20.69,45.28
  Bottom 0.254: v20.69,45.28 20.69,52.01 20.38,52.32 20.38,57.55 20.94,58.11 v21.83,58.11 21.83,52.88 23.58,51.12 36.36,51.12 38.19,52.95 41.39,52.95 42.05,53.61 42.05,57.2 42.49,57.63 J6.10 | v18.35,42.71 18.35,34.83 17.39,33.87 17.39,27.24 v19.54,25.09
SDA  (via drill 0.35)
  Top 0.254: IC1.20 20.29,25.24 v20.43,25.09 21.07,25.09 21.39,24.77 R9.1 | U5.P$6 16.35,59.13 16.75,59.13 18.78,57.09 v21.07,57.09 | v21.58,45.28 21.83,45.03 v21.83,42.23 | J6.9 42.5,56.37 41.83,57.03 41.83,58.55 43.06,59.78 50.93,59.78 51.8,60.65 51.8,61.67 52.56,62.43 54.09,62.43 54.77,61.75 U2.1
  Bottom 0.254: v21.07,57.09 21.07,52.62 21.58,52.12 | 21.58,52.12 23.05,50.64 36.66,50.64 38.19,52.17 41.97,52.17 42.94,53.13 J6.9 | v20.43,25.09 20.69,25.34 20.69,35.88 21.83,37.03 v21.83,42.23 | 21.58,52.12 v21.58,45.28
SDB  (via drill 0.35)
  Top 0.254: v22.46,26.61 21.3,26.61 IC1.22 | U5.P$7 16.28,58.49 v16.5,58.49 | v18.53,49.73 24.5,49.73 30.21,44.01 30.21,39.31 v28.69,37.79
  Bottom 0.254: v16.5,58.49 18.02,56.97 18.02,50.11 18.4,49.73 v18.53,49.73 | v22.46,26.61 22.08,27 22.08,35.88 23.99,37.79 v28.69,37.79
SS  (via drill 0.35)
  Top 0.254: IC1.44 16.29,36.18 17,36.9 17.89,36.9 18.91,37.92 18.91,39.92 U1.5 18.99,41.67 19.56,42.25 v19.69,42.25 | v8.49,42.8 R15.2
  Bottom 0.254: v19.69,42.25 17.93,44 17.29,44 15.09,46.2 12.29,46.2 8.89,42.8 v8.49,42.8
TEMP  (via drill 0.35)
  Top 0.254: v16.75,45.66 19.16,48.08 24.5,48.08 29.45,43.12 29.45,39.95 26.91,37.41 26.53,37.41 25.39,36.27 25.39,35.38 23.41,33.4 IC1.34
  Bottom 0.254: J7.3 2.32,37.23 1,38.55 1,43.2 3.37,45.57 9.46,45.57 11.59,47.7 14.71,47.7 v16.75,45.66
TEMP_SENSOR_POWER  (via drill 0.35)
  Top 0.254: IC1.23 23.1,27.5 23.48,27.12 25.64,27.12 v25.89,26.87 | v60.18,59.38 60.18,60.02 59.93,60.27 59.29,60.27 | 59.29,60.27 C10.1 | U2.5 59.28,60.25 59.29,60.27 | R25.1 53.07,60.27 v52.31,59.51
  Bottom 0.254: v25.89,26.87 27.8,26.87 30.47,29.54 39.79,29.54 41.13,30.88 41.13,45.16 42.02,46.05 48.63,46.05 49.26,46.68 49.26,58.24 50.53,59.51 v52.31,59.51 60.06,59.51 v60.18,59.38
TX  (via drill 0.35)
  Top 0.254: IC1.10 14.83,28 13.96,27.12 v13.96,26.23 | Q3.3 34.6,14.24 v33.89,13.53
  Bottom 0.254: v13.96,26.23 13.7,26.23 12.18,24.71 12.18,19.38 19.04,12.52 32.88,12.52 v33.89,13.53
VBAT  (via drill 0.35)
  Top 0.254: R17.2 43.32,12.47 J3.1
  Top 0.61: Q2.3 16.87,13.41
  Top 0.813: 16.87,13.41 22.31,7.97 v22.31,7.84
  Bottom 0.813: v22.31,7.84 22.46,7.99 41.75,7.99 43.27,9.52 J3.1
VBAT_CHG
  pour Top (no thermals): 44.51,25.55 44.51,26.44 40.04,26.44 40.04,22.7 40.7,22.04 40.7,16.6 40.4,16.3 39.39,16.3 39.38,11.3 41.99,11.3 41.99,22.96
VBAT_SENSE  (via drill 0.35)
  Top 0.254: v30.59,31.95 30.72,31.95 31.86,30.8 36.31,30.8 37.96,29.15 v37.96,27.61 | IC1.30 23.04,31 23.99,31.95 v28.56,31.95 | v49.31,17.29 47.55,17.29 C9.1 R18.1 R17.1
  Bottom 0.254: v30.59,31.95 v28.56,31.95 | v37.96,27.61 38.06,27.51 44.07,27.51 45.15,26.44 45.15,22.8 45.93,22.02 48.73,22.02 49.34,21.41 49.34,17.32 v49.31,17.29
VBUS  (via drill 0.35)
  Top 0.254: U8.VCC 32.49,20.27 v32.62,20.14
  Top 0.381: 17.88,15.48 Q2.1 | C5.2 R28.2 | R1.1 C3.1 | v34.66,19.5 34.66,22.17 37.07,24.58 37.07,28.14 35.93,29.28 32.24,29.28 30.47,31.06 29.7,31.06 28.94,30.3 v28.94,29.54 | R3.2 34.53,49.6 33.77,50.36 31.23,50.36 30.21,49.35 30.21,45.66 31.1,44.77 31.1,35.88 29.07,33.85 v26.4,33.85
  Top 0.508: TC1.2 3.74,31.31 2.91,31.31 2.14,30.55 2.14,28.9 4.3,26.74 v4.3,25.47
  Top 0.813: 17.88,15.48 R16.2 20.39,15.48 23.62,12.25 D1.1 26.15,12.21 C3.1 27.73,9.14 v29.77,11.19 F1.2
  Bottom 0.381: v32.62,20.14 33.26,19.5 v34.66,19.5 v39.74,19.5 | v28.94,29.54 28.94,29.03 27.67,27.76 26.91,27.76 26.4,28.27 v26.4,33.85
  Bottom 0.508: v4.3,25.47 8.62,21.15 8.62,18.18 16.98,9.82 28.41,9.82 v29.77,11.19
  Bottom 1.016: v39.74,19.5 36.69,19.5 35.8,18.61 35.8,13.03 33.96,11.19 v29.77,11.19
  pour Top (no thermals): 39.33,17.57 40.12,17.57 40.12,20.72 39.61,20.72 39.61,20.14 39.33,19.86
VBUS_SENSE  (via drill 0.35)
  Top 0.254: IC1.37 19.79,34.42 20.11,34.74 23.61,34.74 24.62,35.76 24.62,36.52 26.53,38.42 26.53,44.77 v26.02,45.28 | R5.1 R3.1 C2.1 31.86,46.68 v31.61,46.43
  Bottom 0.254: v26.02,45.28 27.16,46.43 v31.61,46.43
VCC  (via drill 0.35)
  Top 0.305: IC1.5 14.26,30.5 13.32,31.44 v13.07,31.44 | IC1.38 19.29,34.86 20.18,35.76 v23.23,35.76 | IC1.27 23.93,29.5 C4.1 | IC1.17 18.79,24.32 19.92,23.18 R10.2 | U5.P$8 16.21,57.86 16.21,57.22
  Top 0.508: J6.2 J6.1 48.02,54.14 49.26,52.9 49.26,51.25 48.14,50.13 U7.3_WP 43.95,50.13 42.68,48.87 U7.7_HOLD U7.8_VCC 41.37,46.19 | U1.13 16.99,56.44 16.21,57.22 9.38,57.22 8.59,56.43 C7.2 8.59,52.68 11.03,50.24 11.03,45.92 9.89,44.77 v8.11,44.77 | R8.1 11.29,17.34 12.69,18.74 12.69,20.01 13.45,20.77 17.42,20.77 U4.2 | R9.2 R10.2 | R19.1 v46.85,38.55 R20.1 | 41.37,46.19 v42.18,45.38 42.53,45.03 R24.1 | 41.37,46.19 41.37,44.88 29.32,32.84 v25.51,32.84 | C4.1 25.09,29.5 25.51,29.92 v25.51,31.06 | U4.2 18.16,20.89 16.75,22.3 v16.75,23.31 | C1.1 20.39,19.18 R10.2 | U4.2 19.53,20.03 C1.1 | C6.1 20.53,18.99 C1.1 | R10.2 18.53,23.19 v18.53,23.18 | R15.1 v8.49,39.3
  Bottom 0.305: v23.23,35.76 23.23,34.49 24.88,32.84 v25.51,32.84
  Bottom 0.508: v13.07,31.44 11.42,31.44 | 6.84,39.3 6.84,35 7.61,34.23 8.62,34.23 11.42,31.44 | 6.84,39.3 6.84,43.51 v8.11,44.77 | v42.18,45.38 43.58,45.38 46.85,42.11 v46.85,38.55 | v25.51,32.84 v25.51,31.06 25.51,28.27 21.45,24.2 19.54,24.2 v18.53,23.18 | v16.75,23.31 16.75,25.09 14.34,27.5 11.16,27.5 10.53,28.14 10.53,30.93 11.03,31.44 11.42,31.44 | v8.49,39.3 6.84,39.3
VIN  (via drill 0.35)
  Top 0.381: 15.92,19.05 U4.3 | 15.96,15.59 Q2.2 | v23.23,14.8 23.23,14.72
  Top 0.508: C8.1 15.92,19.05 | J5.10 J5.8 J5.7 J5.9 J5.10
  Top 0.813: U4.3 15.96,16.07 | 15.96,16.07 15.96,15.59 | 23.23,14.72 23.9,14.05 D1.2 27.41,14.05 v27.93,13.53 | v17.89,16.84 16.72,16.84 15.96,16.07
  Bottom 0.813: v23.23,14.8 19.92,14.8 v17.89,16.84 | v27.93,13.53 31.74,13.53 32.62,14.42 32.62,17.98 31.7,18.9 31.7,21.12 32.62,22.04 41.53,22.04 J5.10

## Text on the board
tPlace: BORC | Control Board | v0.7 / 2021-03-23 | <- LED screen conn. / (contacts face down) | Temp sensor | 915 MHz / antenna | Battery conn. | Reset | on/off / switch
bPlace: Designed by Akram Ali